# EAGLE board indicator_lights (EAGLE 7.2.0)
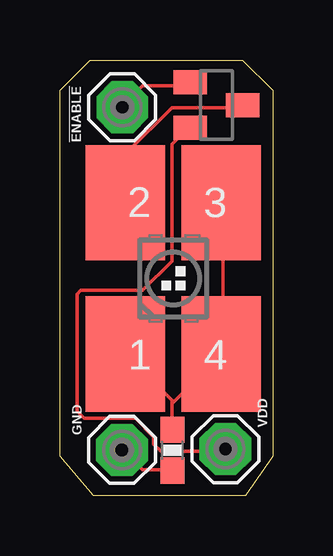
[diagram p0: board, top side]

Size 8.89 x 18.16 mm. Coordinates in mm from the lower left corner, seen from the top.
Outline: 0,16.89 1.27,18.16 7.62,18.16 8.89,16.89 8.89,1.65 7.75,0 1.4,0 0,1.65 0,16.89
Copper layers (1*16): Top 0.0356mm / dielectric 1.5011mm / Bottom 0.0356mm
Design rules "oshpark-2layer": minimum track width 6mil, minimum drill 13mil, track to track 6mil, track to pad 6mil, pad to pad 6mil, via to via 6mil, smd to smd 6mil, copper to edge 15mil, drill to drill 6mil, minimum pad ring 7mil, minimum via ring 7mil, stop-mask expansion 4mil, vias tented up to drill 0mil, thermal gap 10mil

## Footprints (pad centres in the part's own frame; a part is rotated, then mirrored left to right if it is on the bottom)
P-LCC-4-3 = smd 3.3 x 4.8: 1 -2,-3.15; 2 -2,3.15; 3 2,3.15; 4 2,-3.15
MCS10B = drill 1.016 pad 2.159 octagon: MP 0,0
SOT23 = smd 1 x 1.4: 1 -0.95,-1.1; 2 0.95,-1.1; 3 0,1.1
0603-RES = smd 1.1 x 1: 1 -0.85,0; 2 0.85,0

## Placement (x,y rotation side)
LED1  LS E67B  [P-LCC-4-3]  4.73,9.06 0 top
LSP1  MCS10B  [MCS10B]  2.6,16.19 0 top
LSP2  MCS10B  [MCS10B]  6.91,1.95 0 top
LSP3  MCS10B  [MCS10B]  2.59,1.91 0 top
Q1  BSS84  [SOT23]  6.53,16.28 270 top
R1  36  [0603-RES]  4.7,1.91 90 top

## Library data of the parts
LED1 = led
LSP1-LSP3 = solpad
Q1 = transistor-small-signal
R1 = SparkFun-Passives

## Nets
!ENABLE: LSP1.MP Q1.1
GND: LSP3.MP R1.1
N$1: LED1.2 Q1.3
N$2: LED1.1 LED1.3 LED1.4 R1.2
VDD: LSP2.MP Q1.2

## Tracks (layer width: path | path; a pad name or v marks a point on that pad's centre or on a via)
!ENABLE
  Top 0.152: Q1.1 5.28,17.09 3.45,17.09 2.69,16.33 LSP1.MP
GND
  Top 0.152: R1.1 4.67,1.09 3.45,1.09 2.69,1.85 LSP3.MP
N$1
  Top 0.152: Q1.3 7.57,16.18 4.67,16.18 2.85,14.35 2.85,12.22 LED1.2
N$2
  Top 0.152: 4.67,3.83 4.67,3.99 2.85,5.82 LED1.1 | 4.67,3.83 4.67,2.77 R1.2 | 4.67,3.83 6.65,5.82 LED1.4 6.81,5.97 6.81,12.07 LED1.3
VDD
  Top 0.152: Q1.2 5.28,15.27 4.67,14.66 4.67,9.78 3.45,8.56 0.86,8.56 0.71,8.41 0.71,3.53 1.02,3.23 3.15,3.23 3.91,2.46 3.91,2.16 4.22,1.85 6.81,1.85 LSP2.MP

## Text on the board
_tsilk: !ENABLE | GND | VDD